# Altium PCB ctrb0505-A.PcbDoc (part 1 of 2)
Units mm, origin at the board's own origin, x right, y up, seen from the top; angles counter-clockwise.
Board outline 92.5 x 72 mm, 4 copper layers (Top Layer, Mid-Layer 1, Mid-Layer 2, Bottom Layer); 143 components, 70 nets, 526 pads, 81 vias.
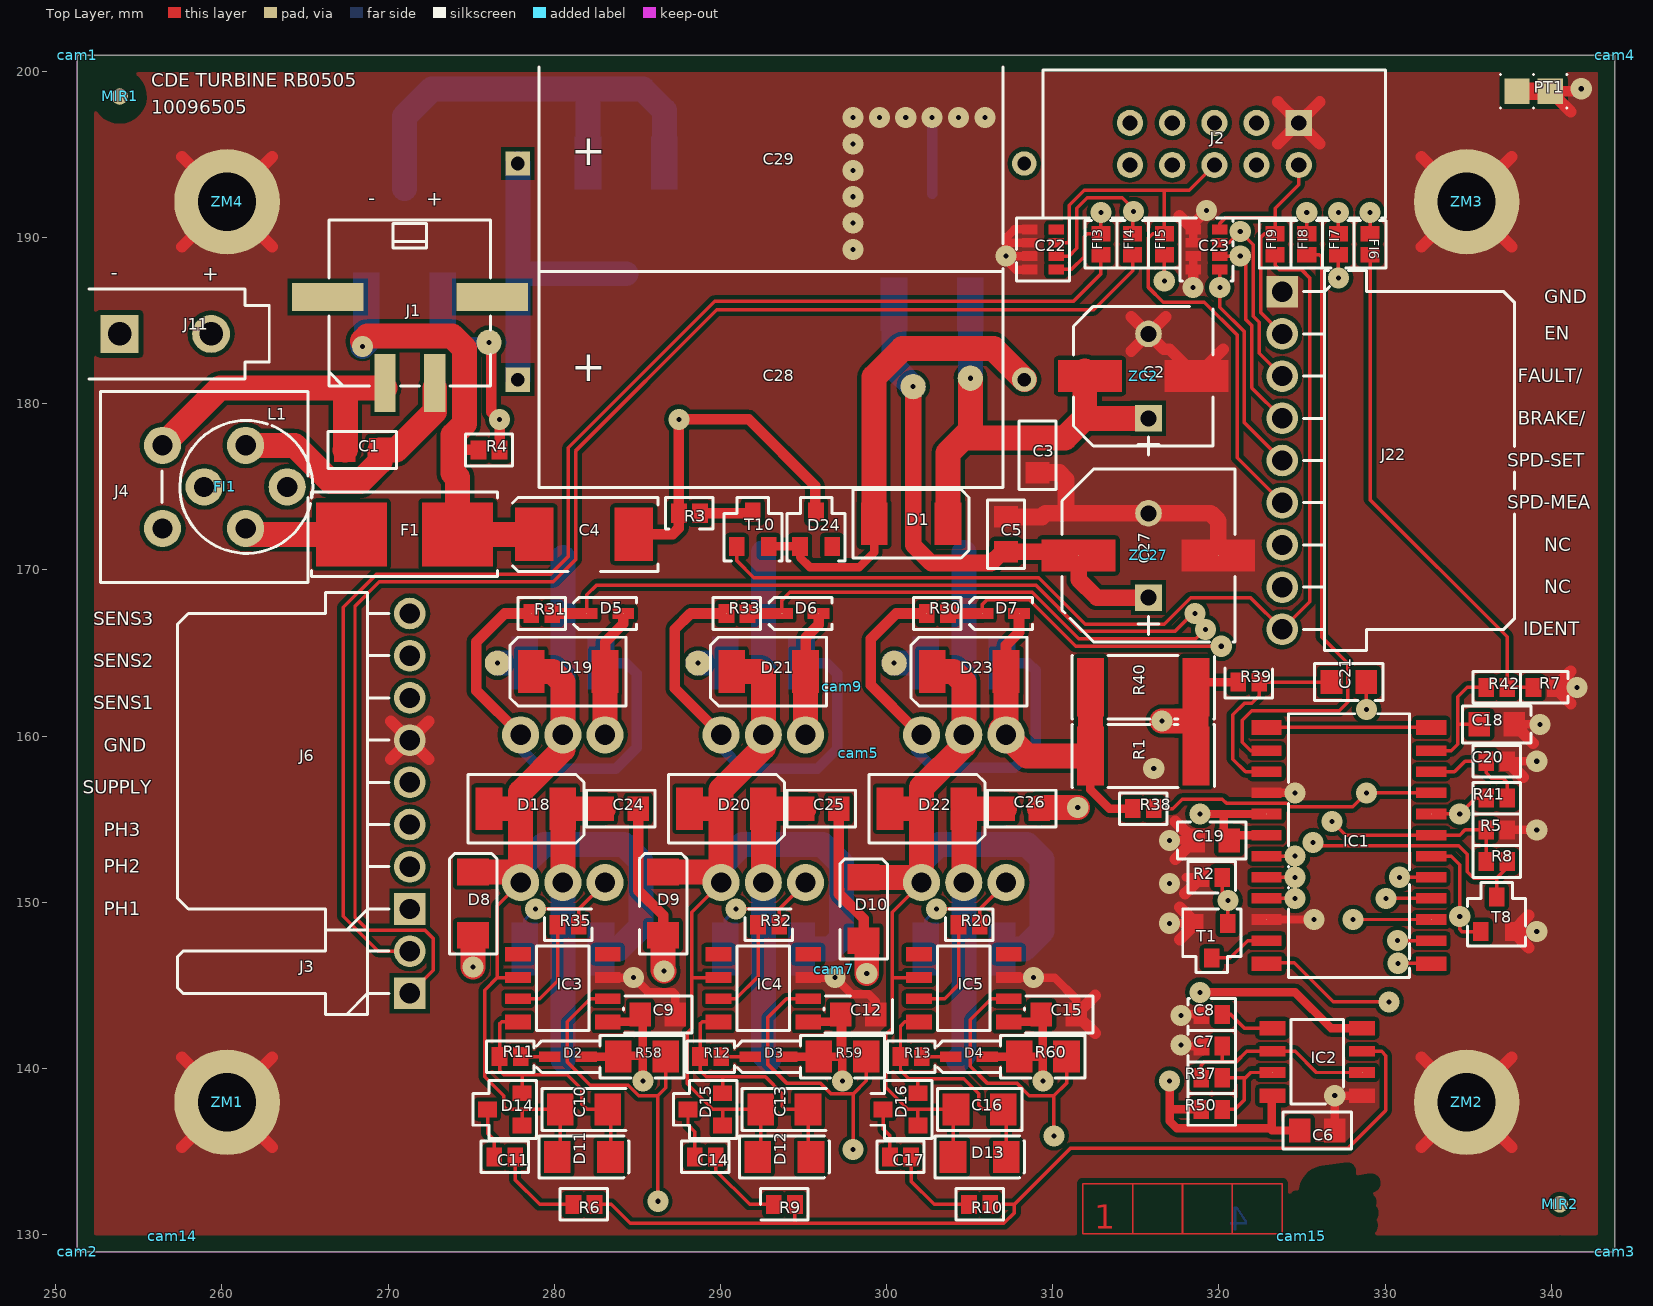
[diagram p0: Top Layer view]
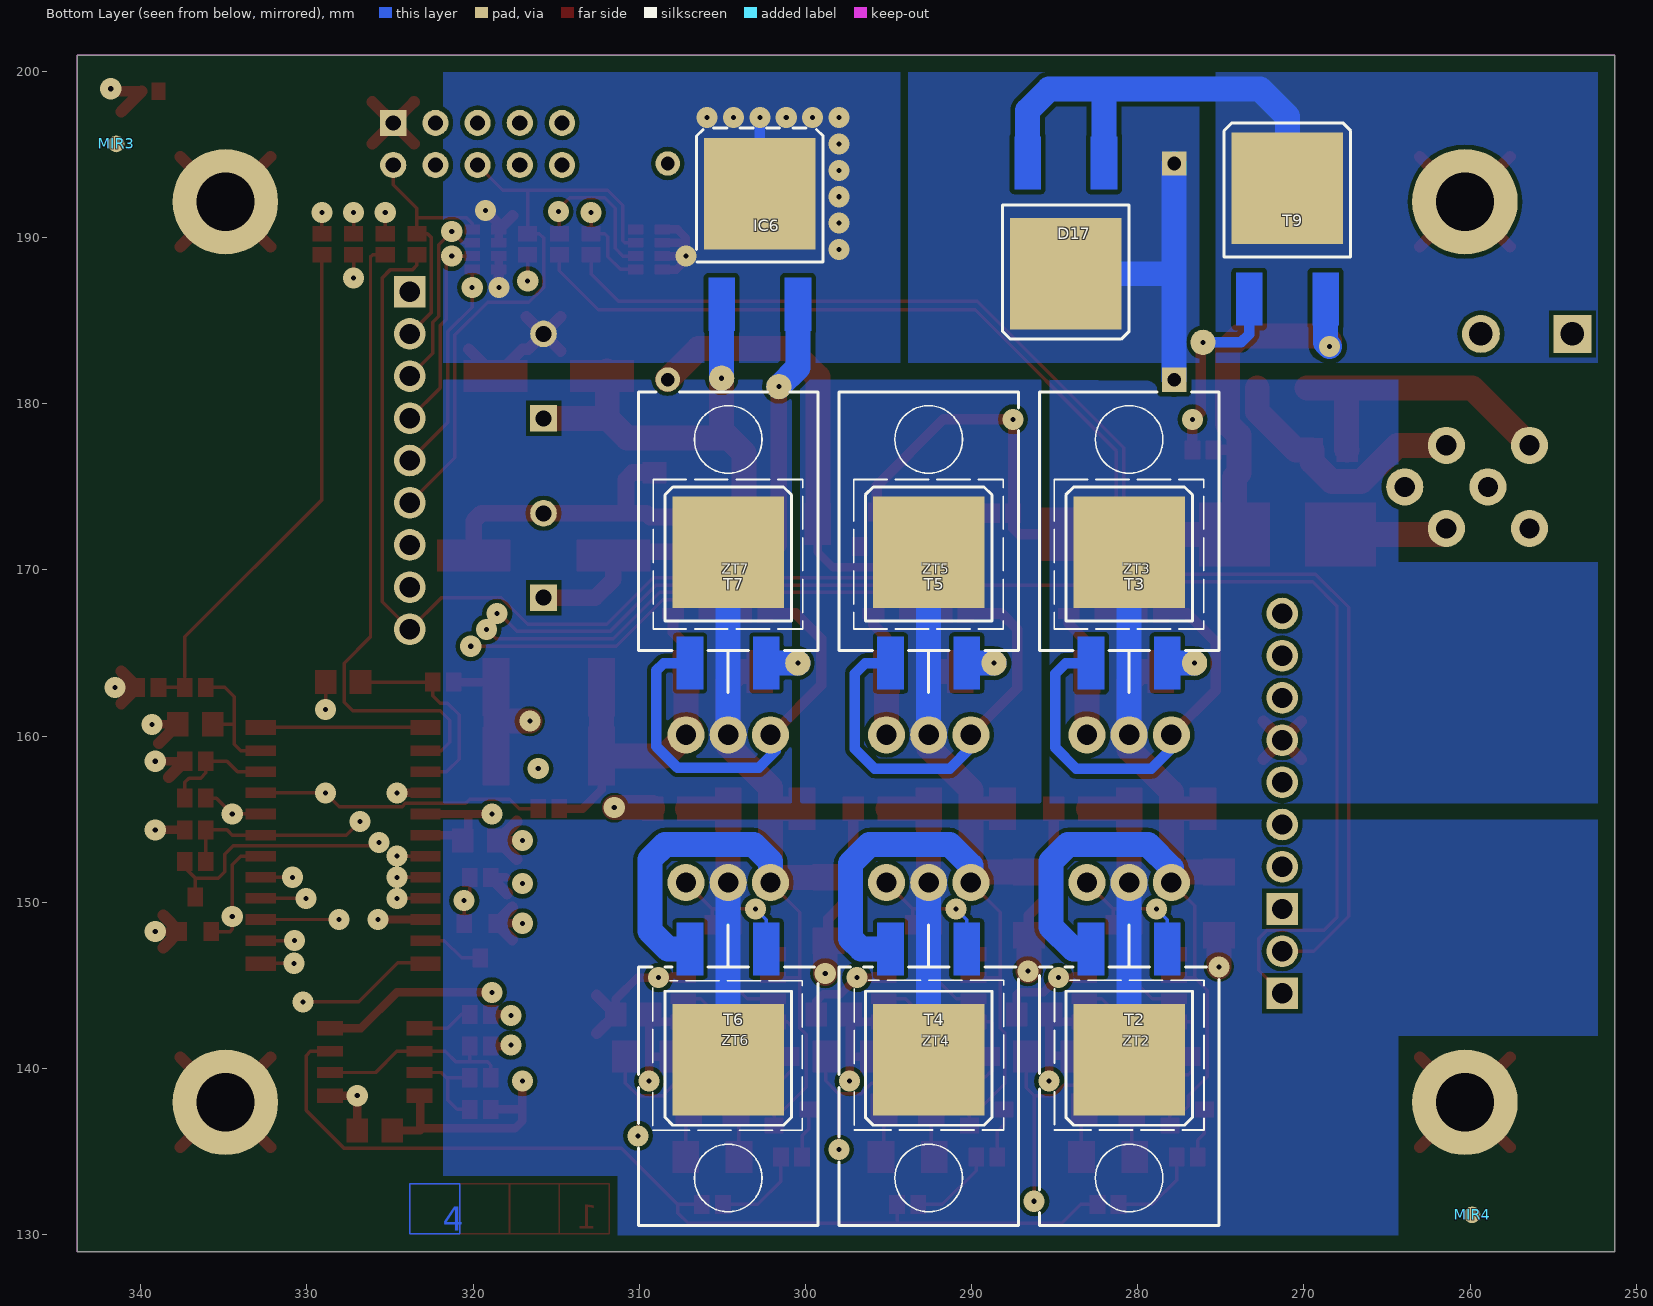
[diagram p1: Bottom Layer view, seen from below]
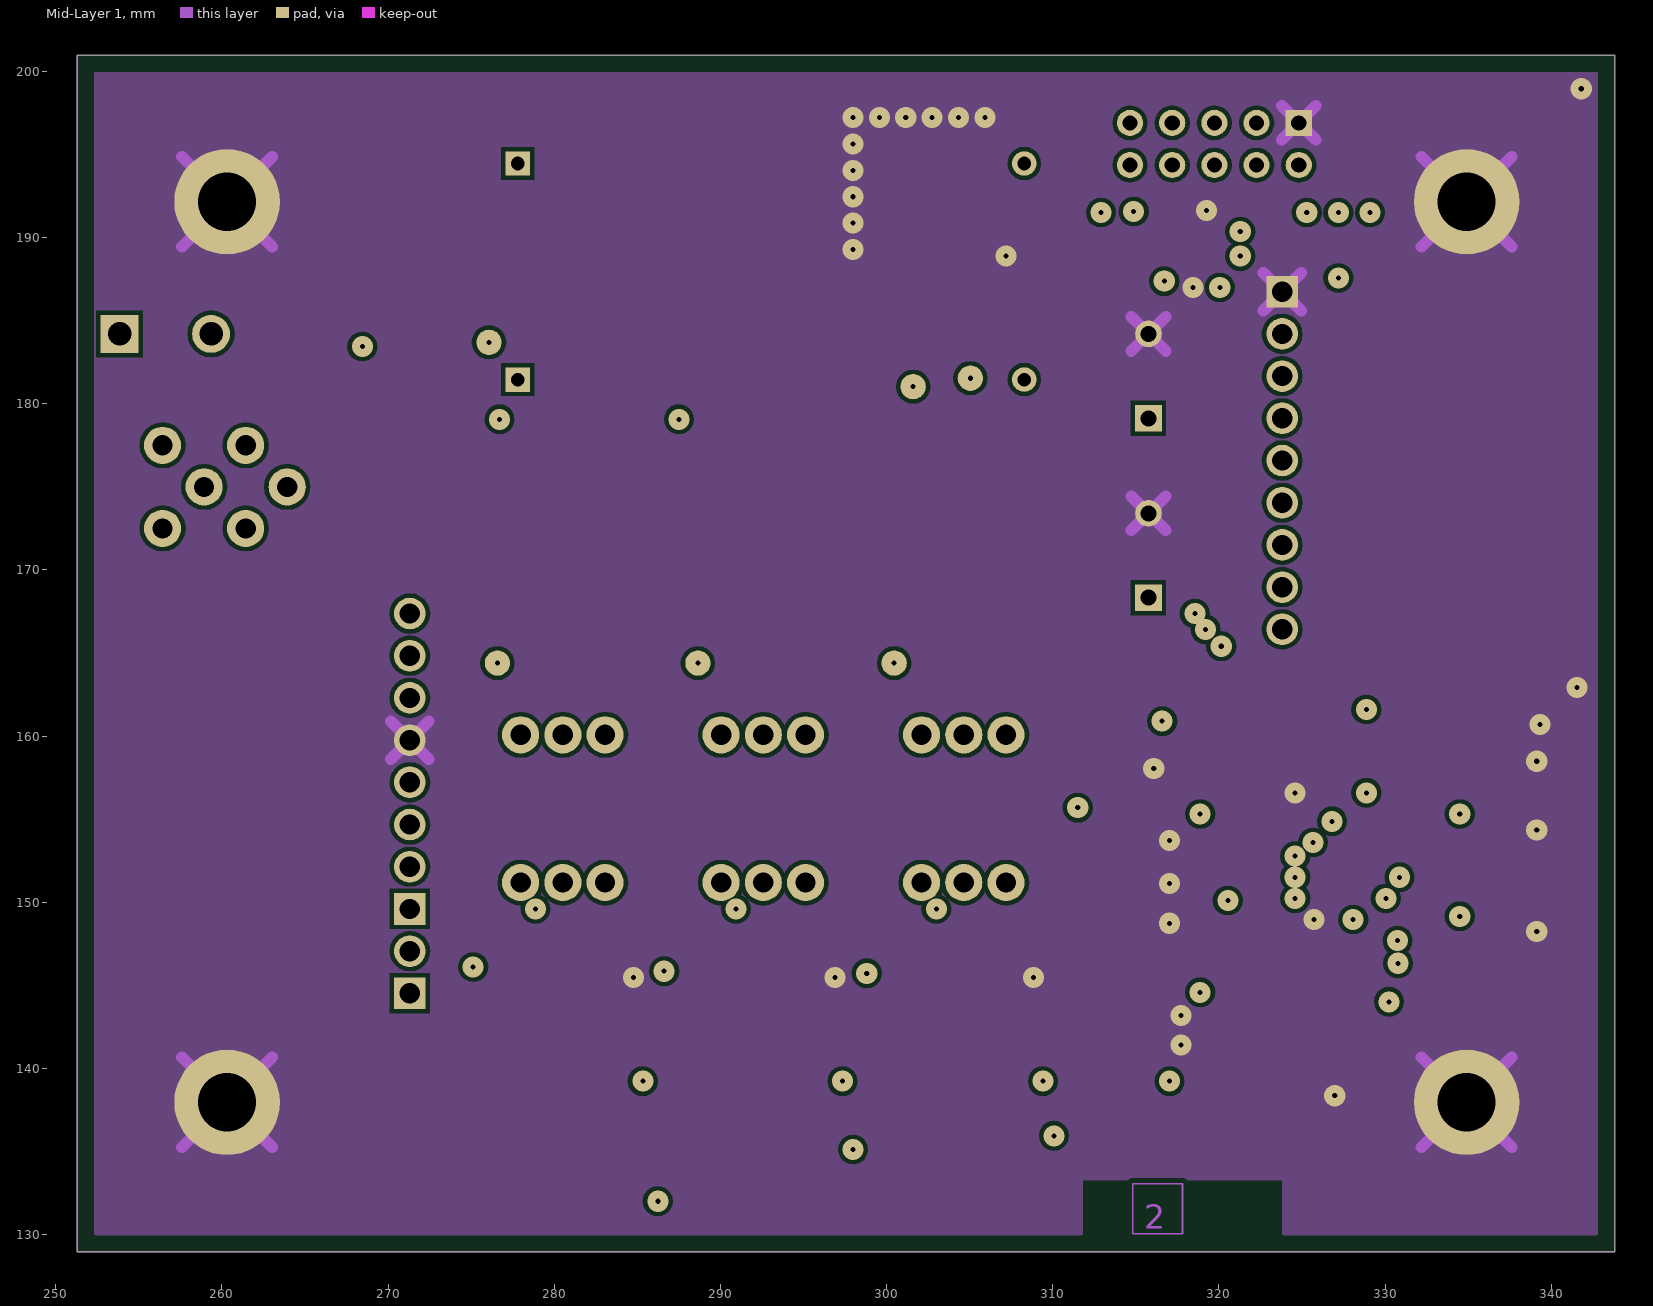
[diagram p2: Mid-Layer 1]
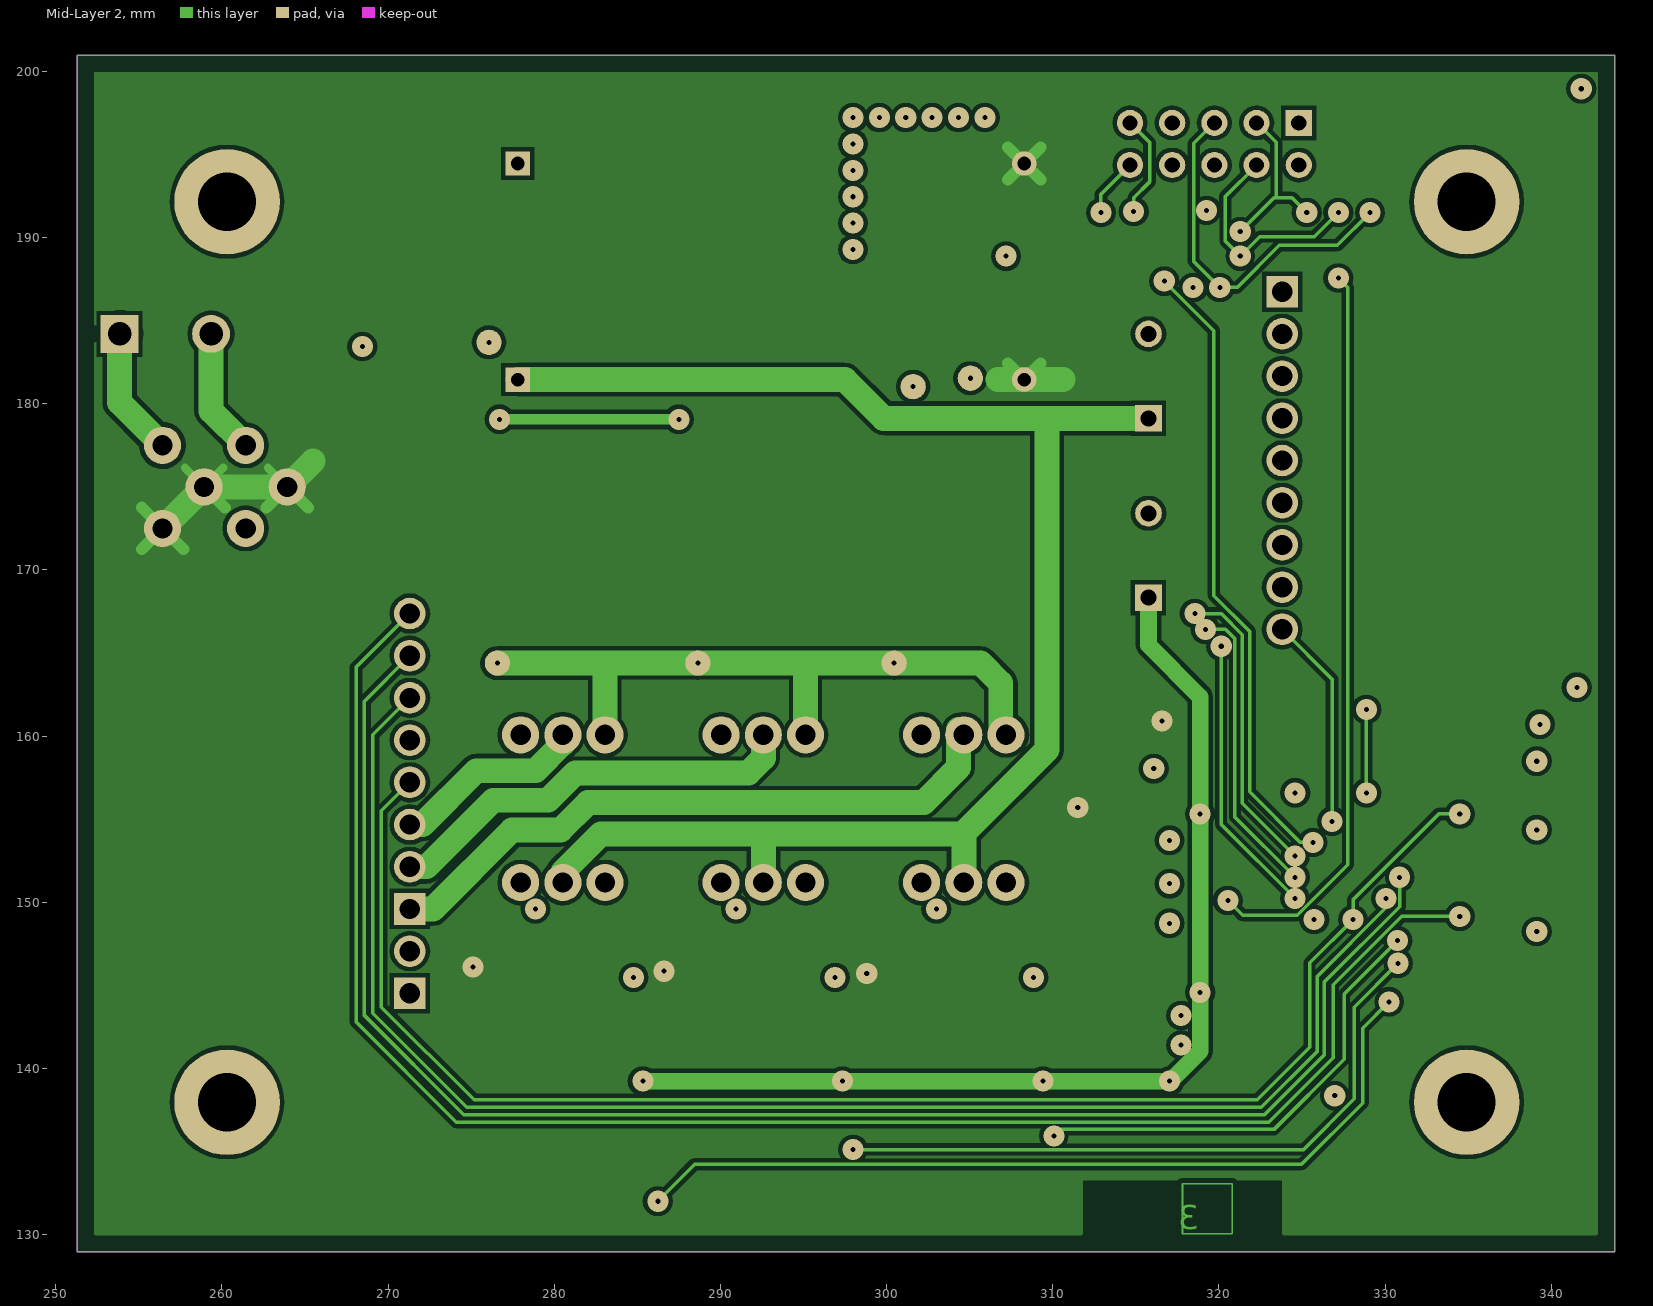
[diagram p3: Mid-Layer 2]

## Layer stack, top to bottom
Resist-A: solder mask 0.0102, Solder Resist, Dk 3.5
Top Layer: signal copper 0.0356
Dielectric 1: dielectric 0.32, FR-4, Dk 4.8
Mid-Layer 1: signal copper 0.0356
Dielectric2: dielectric 0.32, FR-4, Dk 4.8
Mid-Layer 2: signal copper 0.0356
Dielectric3: dielectric 0.32, FR-4, Dk 4.8
Bottom Layer: signal copper 0.0356
Resist-B: solder mask 0.0102, Solder Resist, Dk 3.5

## Board outline
251.306,128.959 251.306,200.959 343.806,200.959 343.806,128.959 251.306,128.959

## Design rules (kind name [scope] priority, off if disabled: settings)
Clearance [All] p1: gap=0.254 ignorepadtopadclearanceinfootprint=FALSE except(0: Arc-Hole Track-Hole SMDPad-Hole THPad-Hole Via-Hole Fill-Hole Poly-Hole Region-Hole Text-Hole)
PlaneClearance PlaneClearance_40640 [(InPadClass('VIA-091X03-VE') AND (OnLayer('Assem_(MISC)') OR OnLayer('No_PISTE+VIA_FC')))] p1: clearance=0.406
PlaneClearance PlaneClearance_55880 [(InPadClass('VIA-091X03-VE') AND (OnLayer('Symbol-B-1')))] p2: clearance=0.559
PlaneClearance PlaneClearance_30480 [(InPadClass('VIA-091X03-VE') AND (OnLayer('HeightLimit-A') OR OnLayer('Symbol-B-1') OR OnLayer('Symbol-A-1')))] p3: clearance=0.305
PlaneClearance PlaneClearance_175260 [(InPadClass('MEL35M') AND (OnLayer('Assem_(MISC)') OR OnLayer('No_PISTE+VIA_FC')))] p4: clearance=1.753
PlaneClearance PlaneClearance_172720 [(InPadClass('MEL35M') AND (OnLayer('Symbol-B-1')))] p5: clearance=1.727
PlaneClearance PlaneClearance_142240 [(InPadClass('MEL35M') AND (OnLayer('HeightLimit-A') OR OnLayer('Symbol-B-1') OR OnLayer('Symbol-A-1')))] p6: clearance=1.422
PlaneClearance PlaneClearance_58420 [(InPadClass('P.Q-1') AND (OnLayer('Symbol-B-1'))) OR (InPadClass('P.Q') AND (OnLayer('HeightLimit-A') OR OnLayer('Symbol-B-1') OR OnLayer('Symbol-A-1')))] p7: clearance=0.584
PlaneClearance PlaneClearance_45720 [(InPadClass('P.K1') AND (OnLayer('Assem_(MISC)') OR OnLayer('No_PISTE+VIA_FC')))] p8: clearance=0.457
PlaneClearance PlaneClearance_64770 [(InPadClass('P.K1-1') AND (OnLayer('Symbol-B-1'))) OR (InPadClass('P.K1') AND (OnLayer('Symbol-B-1')))] p9: clearance=0.648
PlaneClearance PlaneClearance_34290 [(InPadClass('P.K1-1') AND (OnLayer('Symbol-B-1'))) OR (InPadClass('P.K1') AND (OnLayer('HeightLimit-A') OR OnLayer('Symbol-B-1') OR OnLayer('Symbol-A-1')))] p10: clearance=0.343
PlaneClearance PlaneClearance_60960 [(InPadClass('P.K') AND (OnLayer('Assem_(MISC)') OR OnLayer('No_PISTE+VIA_FC')))] p11: clearance=0.61
PlaneClearance PlaneClearance_71120 [(InPadClass('P.K') AND (OnLayer('HeightLimit-A') OR OnLayer('Symbol-B-1') OR OnLayer('Symbol-A-1')))] p12: clearance=0.711
PlaneClearance PlaneClearance_50800 [(InPadClass('P.K') AND (OnLayer('HeightLimit-A') OR OnLayer('Symbol-B-1') OR OnLayer('Symbol-A-1')))] p13: clearance=0.508
PlaneClearance PlaneClearance_43180 [(InPadClass('DIP') AND (OnLayer('Assem_(MISC)') OR OnLayer('No_PISTE+VIA_FC'))) OR (InPadClass('P.V') AND (OnLayer('Assem_(MISC)') OR OnLayer('No_PISTE+VIA_FC'))) OR (InPadClass('P.Q-1') AND (OnLayer('Symbol-B-1'))) OR (InPadClass('P.Q') AND (OnLayer('HeightLimit-A') OR OnLayer('Symbol-B-1') OR OnLayer('Symbol-A-1')))] p14: clearance=0.432
PlaneClearance PlaneClearance_48260 [(InPadClass('DIP-1') AND (OnLayer('Symbol-B-1'))) OR (InPadClass('DIP') AND (OnLayer('HeightLimit-A') OR OnLayer('Symbol-B-1') OR OnLayer('Symbol-A-1'))) OR (InPadClass('P.V-1') AND (OnLayer('Symbol-B-1'))) OR (InPadClass('P.V') AND (OnLayer('HeightLimit-A') OR OnLayer('Symbol-B-1') OR OnLayer('Symbol-A-1')))] p15: clearance=0.483
PlaneClearance PlaneClearance_33020 [(InPadClass('DIP-1') AND (OnLayer('Symbol-B-1'))) OR (InPadClass('DIP') AND (OnLayer('HeightLimit-A') OR OnLayer('Symbol-B-1') OR OnLayer('Symbol-A-1'))) OR (InPadClass('P.V-1') AND (OnLayer('Symbol-B-1'))) OR (InPadClass('P.V') AND (OnLayer('HeightLimit-A') OR OnLayer('Symbol-B-1') OR OnLayer('Symbol-A-1')))] p16: clearance=0.33
PlaneClearance PlaneClearance_41910 [(InPadClass('P.N') AND (OnLayer('Assem_(MISC)') OR OnLayer('No_PISTE+VIA_FC')))] p17: clearance=0.419
PlaneClearance PlaneClearance_53340 [(InPadClass('P.N-1') AND (OnLayer('Symbol-B-1'))) OR (InPadClass('P.N') AND (OnLayer('Symbol-B-1'))) OR (InPadClass('P.Q') AND (OnLayer('Assem_(MISC)') OR OnLayer('No_PISTE+VIA_FC')))] p18: clearance=0.533
PlaneClearance PlaneClearance_31750 [(InPadClass('P.N-1') AND (OnLayer('Symbol-B-1'))) OR (InPadClass('P.N') AND (OnLayer('HeightLimit-A') OR OnLayer('Symbol-B-1') OR OnLayer('Symbol-A-1')))] p19: clearance=0.318
PlaneConnect [All] p1: planeconnectstyle=Direct reliefexpansion=0.508 reliefentries=4 reliefconductorwidth=0.254 reliefairgap=0.254
PolygonConnect [All] p1: connectstyle=Direct reliefconductorwidth=0.254 reliefentries=4 polygonreliefangle="90 Angle" airgapwidth=0.254
RoutingVias RoutingVias_VIA-091X03-VE_2 [OnLayer('Assem_(MISC)') OR OnLayer('No_PISTE+VIA_FC')] p1: holewidth=0.305 width=1.118 viastyle="Through Hole" minholewidth=0.305 minwidth=1.118 maxholewidth=0.305 maxwidth=1.118
RoutingVias RoutingVias_VIA-091X03-VE_1 [OnLayer('Symbol-B-1')] p2: holewidth=0.305 width=1.422 viastyle="Through Hole" minholewidth=0.305 minwidth=1.422 maxholewidth=0.305 maxwidth=1.422
RoutingVias RoutingVias_VIA-091X03-VE [OnLayer('HeightLimit-A') OR OnLayer('Symbol-B-1') OR OnLayer('Symbol-A-1')] p3: holewidth=0.305 width=0.914 viastyle="Through Hole" minholewidth=0.305 minwidth=0.914 maxholewidth=0.305 maxwidth=0.914
SilkToSilkClearance [All] p1 off: silktosilkclearance=0.254
SilkToSolderMaskClearance [IsPad] p1 off: minsilkscreentomaskgap=0.254 clearancetoexposedcopper=TRUE
SolderMaskExpansion [All] p1: expansion=0.102 istentingtop=FALSE
Width [All] p1: maxlimit=0.254 minlimit=0.254 preferedwidth=0.254
26 further rules are at their usual default settings.

## Classes and differential pairs
pad class VIA-091X03-VE: Free-VIA-091X03-VE
pad class MEL35M: ZM1-1 ZM2-1 ZM3-1 ZM4-1
pad class P.Q: J11-2
pad class P.Q-1: J11-1
pad class P.K1: J3-2 J6-2 J6-3 J6-4 J6-5 J6-6 J6-7 J6-8 J22-2 J22-3 J22-4 J22-5 J22-6 J22-7 J22-8 J22-9
pad class P.K1-1: J3-1 J6-1 J22-1
pad class P.V: J2-2 J2-3 J2-4 J2-5 J2-6 J2-7 J2-8 J2-9 J2-10
pad class P.V-1: J2-1
pad class P.K: FI1-B FI1-CB FI1-CG1 FI1-CG2 FI1-CG3 FI1-PSG ZT2-D ZT2-G ZT2-S ZT3-D ZT3-G ZT3-S ZT4-D ZT4-G ZT4-S ZT5-D ZT5-G ZT5-S ZT6-D ZT6-G ZT6-S ZT7-D ZT7-G ZT7-S
pad class DIP: C28-- C29--
pad class DIP-1: C28-+ C29-+
pad class P.N: C2-- C27--
pad class P.N-1: C2-+ C27-+

## Components (designator, comment, footprint, x,y, rotation, side; value= is the part's Value field where it differs from the comment)
C1 "C-BC-C0805" C0805 268.451,177.219 r0 top
C2 "C-BTP-803" 03515 315.758,181.664 r0 top
C3 "C-BC-C0805" C0805 309.091,176.902 r90 top
C4 "C-BCP-C7343" C7343 281.786,172.139 r0 top
C5 "C-BC-C0805" C0805 307.186,172.139 r270 top
C6 "C-BC-C0805" C0805 325.918,136.262 r180 top
C7 "C-BC-C0603" C0603 319.568,141.342 r0 top
C8 "C-BC-C0603" C0603 319.568,143.247 r0 top
C9 "C-BC-C0805" C0805 286.231,143.247 r180 top
C10 "C-BC-C1206" RC1206 281.786,137.532 r0 top
C11 "C-BC-C0603" C0603 277.023,134.674 r180 top
C12 "C-BC-C0805" C0805 298.296,143.247 r180 top
C13 "C-BC-C1206" RC1206 293.851,137.532 r0 top
C14 "C-BC-C0603" C0603 289.088,134.674 r180 top
C15 "C-BC-C0805" C0805 310.361,143.247 r180 top
C16 "C-BC-C1206" RC1206 305.598,137.532 r0 top
C17 "C-BC-C0603" C0603 300.836,134.674 r180 top
C18 "C-BC-C0805" C0805 336.713,160.709 r0 top
C19 "C-BC-C0805" C0805 319.568,153.724 r180 top
C20 "C-BC-C0603" C0603 336.713,158.487 r180 top
C21 "C-BC-C0805" C0805 327.823,163.249 r0 top
C22 "CC-BC-C0612" C0612-4 309.408,189.284 r90 top
C23 "CC-BC-C0612" C0612-4 319.251,189.284 r270 top
C24 "C-BC-C0805" C0805 284.008,155.629 r0 top
C25 "C-BC-C0805" C0805 296.073,155.629 r0 top
C26 "C-BC-C0805" C0805 308.138,155.629 r0 top
C27 "C-BTP-803" 03515 315.758,170.869 r0 top
C28 "C-BTP-HT1327" HT-13X27 277.806,181.459 r0 top
C29 "C-BTP-HT1327" HT-13X27 277.806,194.459 r0 top
cam1 "COIN_EXTERNE" COIN_EXTERNE 251.306,200.959 r0 top
cam2 "COIN_EXTERNE" COIN_EXTERNE 251.306,128.959 r90 top
cam3 "COIN_EXTERNE" COIN_EXTERNE 343.806,128.959 r180 top
cam4 "COIN_EXTERNE" COIN_EXTERNE 343.806,200.959 r270 top
cam5 "FILM18_HORIZONTAL" FILM18_HORIZONTAL 298.306,158.959 r0 top
cam6 "A3_PER_COVIDIEN" A3_PER_COVIDIEN 216,139.5 r0 top
cam7 "A3_EQFC_COVIDIEN" A3_EQFC_COVIDIEN 296.806,145.959 r0 top
cam8 "PER-COVIDIEN_TEXTE" PER-COVIDIEN_TEXTE 260.806,97.959 r0 top
cam9 "A3_EQFS_COVIDIEN" A3_EQFS_COVIDIEN 297.306,162.959 r180 top
cam12 "FABRICATION-FEE" FABRICATION-FEE 148.906,235.559 r0 top
cam13 "PERCAGE_TABLEAU" PERCAGE_TABLEAU 140.106,152.859 r0 top
cam14 "FEE_COMP" FEE_COMP 257.021,129.912 r180 top
cam15 "FEE_COMP" FEE_COMP 324.966,129.912 r0 top
D1 "D-BC-SMB" SMB 301.471,172.774 r180 top
D2 "D-BC-SOD323" SOD323 280.833,140.707 r0 top
D3 "D-BC-SOD323" SOD323 292.898,140.707 r0 top
D4 "D-BC-SOD323" SOD323 304.963,140.707 r0 top
D5 "D-BC-SOD323" SOD323 283.056,167.377 r0 top
D6 "D-BC-SOD323" SOD323 294.803,167.377 r0 top
D7 "D-BC-SOD323" SOD323 306.868,167.377 r0 top
D8 "D-BC-SMA" SMA 275.118,149.914 r270 top
D9 "D-BC-SMA" SMA 286.548,149.914 r270 top
D10 "D-BC-SMA" SMA 298.613,149.597 r270 top
D11 "D-BC-SOD80" SOD80 281.786,134.674 r0 top
D12 "D-BC-SOD80" SOD80 293.851,134.674 r0 top
D13 "D-BC-SOD80" SOD80 305.598,134.674 r0 top
D14 "D-BC-SOT23" SOT23-1G 277.023,137.532 r90 top
D15 "D-BC-SOT23" SOT23-1G 289.088,137.532 r90 top
D16 "D-BC-SOT23" SOT23-1G 300.836,137.532 r90 top
D17 "D-BC-DPAK-2ANODES" DPAK-2ANODES 284.326,189.602 r0 bottom
D18 "D-BC-SMB" SMB 278.293,155.629 r180 top
D19 "D-BC-SMB" SMB 280.833,163.884 r0 top
D20 "D-BC-SMB" SMB 290.358,155.629 r180 top
D21 "D-BC-SMB" SMB 292.898,163.884 r0 top
D22 "D-BC-SMB" SMB 302.423,155.629 r180 top
D23 "D-BC-SMB" SMB 304.963,163.884 r0 top
D24 "D-BC-SOT23" SOT23-1G 295.756,172.457 r0 top
F1 "FU-BC-154000" FU154000 270.991,172.139 r0 top
FI1 "FL-10-BNX002-01" BNX002 258.926,174.997 r0 top
FI3 "SF-BC-S0603" C0603 312.901,189.602 r270 top
FI4 "SF-BC-S0603" C0603 314.806,189.602 r270 top
FI5 "SF-BC-S0603" C0603 316.711,189.602 r270 top
FI6 "SF-BC-S0603" C0603 329.093,189.602 r270 top
FI7 "SF-BC-S0603" C0603 327.188,189.602 r270 top
FI8 "SF-BC-S0603" C0603 325.283,189.602 r270 top
FI9 "SF-BC-S0603" C0603 323.378,189.602 r270 top
IC1 "L-BC-SO24" MX.A24_COMPOSANT 327.823,153.407 r90 top
IC2 "L-BC-SO08" MX.A8_COMPOSANT 325.918,140.389 r90 top
IC3 "L-BC-SO08" MX.A8_COMPOSANT 280.516,144.834 r90 top
IC4 "L-BC-SO08" MX.A8_COMPOSANT 292.581,144.834 r90 top
IC5 "L-BC-SO08" MX.A8_COMPOSANT 304.646,144.834 r90 top
IC6 "REG-BC-DPAK" DPAK 302.741,190.872 r180 bottom
J1 "F-COCMS-MOL43650-0212" MOL43650-02C 271.306,181.249 r180 top
J2 "F-CO-HE10-2010D" BP2X5D 324.806,196.904 r180 top
J3 "F-CO-MOL7395M02" MOL7395-2 271.308,144.517 r90 top
J6 "F-CO-MOL7395M08" MOL7395-8 271.308,149.597 r90 top
J11 "F-CO-MOL5566-02" MOL5566-2 253.846,184.204 r270 top
J22 "F-CO-MOL7395M09" MOL7395-9 323.806,186.744 r270 top
MIR1 "MIRECMS" MIRECMS-SAFT#1 253.846,198.492 r0 top
MIR2 "MIRECMS" MIRECMS-SAFT#1 340.523,131.817 r0 top
MIR3 "MIRECMS" MIRECMS-SAFT#2 341.476,195.634 r180 bottom
MIR4 "MIRECMS" MIRECMS-SAFT#2 259.878,131.182 r180 bottom
PT1 "PT-CMS-C12000" C12000 338.936,198.809 r180 top
R1 "R-BC-R2512" R2512 315.441,158.804 r0 top
R2 "R-BC-R0603" R0603 319.568,151.502 r0 top
R3 "R-BC-R0603" R0603 288.136,173.409 r180 top
R4 "R-BC-R0603" R0603 276.071,177.219 r180 top
R5 "R-BC-R0603" R0603 336.713,154.359 r180 top
R6 "R-BC-R0603" R0603 281.786,131.817 r0 top
R7 "R-BC-R0603" R0603 339.571,162.932 r180 top
R8 "R-BC-R0603" R0603 336.713,152.454 r0 top
R9 "R-BC-R0603" R0603 293.851,131.817 r0 top
R10 "R-BC-R0603" R0603 305.598,131.817 r0 top
R11 "R-BC-R0603" R0603 277.341,140.707 r180 top
R12 "R-BC-R0603" R0603 289.406,140.707 r180 top
R13 "R-BC-R0603" R0603 301.471,140.707 r180 top
R20 "R-BC-R0603" R0603 304.963,148.644 r0 top
R30 "R-BC-R0603" R0603 303.058,167.377 r180 top
R31 "R-BC-R0603" R0603 279.246,167.377 r180 top
R32 "R-BC-R0603" R0603 292.898,148.644 r0 top
R33 "R-BC-R0603" R0603 290.993,167.377 r180 top
R35 "R-BC-R0603" R0603 280.833,148.644 r0 top
R37 "R-BC-R0603" R0603 319.568,139.437 r0 top
R38 "R-BC-R0603" R0603 315.441,155.629 r180 top
R39 "R-BC-R0603" R0603 321.791,163.249 r180 top
R40 "R-BC-R2512" R2512 315.441,162.932 r180 top
R41 "R-BC-R0603" R0603 336.713,156.264 r0 top
R42 "R-BC-R0603" R0603 336.713,162.932 r180 top
R50 "R-BC-R0603" R0603 319.568,137.532 r180 top
R58 "R-BC-R1206" RC1206 285.278,140.707 r180 top
R59 "R-BC-R1206" RC1206 297.343,140.707 r180 top
R60 "R-BC-R1206" RC1206 309.408,140.707 r180 top
T1 "Q-SOT23-IRLML2803" SOT23-GSD 319.568,147.692 r180 top
T2 "Q-BC-DPAK-GDS" DPAK-GDS 280.516,142.294 r0 bottom
T3 "Q-BC-DPAK-GDS" DPAK-GDS 280.516,169.282 r180 bottom
T4 "Q-BC-DPAK-GDS" DPAK-GDS 292.581,142.294 r0 bottom
T5 "Q-BC-DPAK-GDS" DPAK-GDS 292.581,169.282 r180 bottom
T6 "Q-BC-DPAK-GDS" DPAK-GDS 304.646,142.294 r0 bottom
T7 "Q-BC-DPAK-GDS" DPAK-GDS 304.646,169.282 r180 bottom
T8 "Q-SOT23-IRLML2803" SOT23-GSD 336.713,149.279 r0 top
T9 "Q-BC-DPAK-GDS" DPAK-GDS 270.991,191.189 r180 bottom
T10 "Q-SOT23-IRLML2803" SOT23-GSD 291.946,172.457 r0 top
ZC2 "C-BCP-WX8" C-SC8 315.441,181.664 r90 top
ZC27 "C-BCP-WX10" C-SC10 315.758,170.869 r90 top
ZM1 "FIX-0035M" FIX35M 260.306,137.959 r0 top
ZM2 "FIX-0035M" FIX35M 334.906,137.959 r0 top
ZM3 "FIX-0035M" FIX35M 334.906,192.159 r0 top
ZM4 "FIX-0035M" FIX35M 260.306,192.159 r0 top
ZT2 "Q-BT-TO220AB-GDS-INV" TO220ABGDS-INV_COUCHE 280.516,133.404 r0 bottom
ZT3 "Q-BT-TO220AB-GDS-INV" TO220ABGDS-INV_COUCHE 280.516,177.854 r180 bottom
ZT4 "Q-BT-TO220AB-GDS-INV" TO220ABGDS-INV_COUCHE 292.581,133.404 r0 bottom
ZT5 "Q-BT-TO220AB-GDS-INV" TO220ABGDS-INV_COUCHE 292.581,177.854 r180 bottom
ZT6 "Q-BT-TO220AB-GDS-INV" TO220ABGDS-INV_COUCHE 304.646,133.404 r0 bottom
ZT7 "Q-BT-TO220AB-GDS-INV" TO220ABGDS-INV_COUCHE 304.646,177.854 r180 bottom

## Footprints (in the part's own frame and the unit in brackets; to place one, negate y for a bottom-side part, rotate by r counter-clockwise, add the part's x,y. Pads: shape width x height; smd on the part's side, far side on the other; paste and mask are expansions set on the pad)
03515 [mil]
  rect 63x63 hole 38 mask+2.03: +(0,-100)
  round 63 hole 38 mask+2.03: -(0,100)
  silkscreen extent -25,-188 25,-144
A3_EQFC_COVIDIEN [mm]
A3_EQFS_COVIDIEN [mm]
A3_PER_COVIDIEN [mm]
BNX002 [mil]
  round 88 hole 48 mask+2.03: B(98.43,98.43) CB(98.43,-98.43) CG1(-98.43,-98.43) CG2(0,0) CG3(196.85,0) PSG(-98.43,98.43)
  silkscreen extent -246,-226 246,226, body extent -246,-226 246,226, height 512
BP2X5D [mil]
  rect 62x62 hole 36 mask+2.03: 1(0,0)
  round 62 hole 36 mask+2.03: 2(0,100) 3(100,0) 4(100,100) 5(200,0) 6(200,100) 7(300,0) 8(300,100) 9(400,0) 10(400,100)
  silkscreen extent -206,-125 606,225
C0603 [mm]
  round 0.005 smd: 1(-0.635,0) 2(0.635,0)
  Top Layer region: 1.092,-0.559 0.178,-0.559 0.178,0.559 1.092,0.559
  Top Layer region: -0.178,-0.559 -1.092,-0.559 -1.092,0.559 -0.178,0.559
  silkscreen extent -1.43,-0.95 1.43,0.95, body extent -1.43,-0.95 1.43,0.95, height 1.02
C0612-4 [mm]
  round 0.005 smd: 1(-1.2,-0.8) 2(-0.4,-0.8) 3(0.4,-0.8) 4(1.2,-0.8) 5(1.2,0.8) 6(0.4,0.8) 7(-0.4,0.8) 8(-1.2,0.8)
  Top Layer region: -1.479,0.343 -1.479,1.257 -0.921,1.257 -0.921,0.343
  Top Layer region: -0.679,0.343 -0.679,1.257 -0.121,1.257 -0.121,0.343
  Top Layer region: 0.121,0.343 0.121,1.257 0.679,1.257 0.679,0.343
  Top Layer region: 0.921,0.343 0.921,1.257 1.479,1.257 1.479,0.343
  Top Layer region: 0.921,-1.257 0.921,-0.343 1.479,-0.343 1.479,-1.257
  Top Layer region: 0.121,-1.257 0.121,-0.343 0.679,-0.343 0.679,-1.257
  Top Layer region: -0.679,-1.257 -0.679,-0.343 -0.121,-0.343 -0.121,-1.257
  Top Layer region: -1.479,-1.257 -1.479,-0.343 -0.921,-0.343 -0.921,-1.257
  silkscreen extent -1.91,-1.59 1.91,1.59, body extent -1.91,-1.59 1.91,1.59, height 1.27
C0805 [mm]
  round 0.005 smd: 1(-1.05,0) 2(1.05,0)
  Top Layer region: 1.685,-0.711 0.415,-0.711 0.415,0.711 1.685,0.711
  Top Layer region: -0.415,-0.711 -1.685,-0.711 -1.685,0.711 -0.415,0.711
  silkscreen extent -2.06,-1.11 2.06,1.11, body extent -2.06,-1.11 2.06,1.11, height 1.32
C7343 [mil]
  round 0.2 smd: +(-118,0) -(118,0)
  Top Layer region: 163,-63 73,-63 73,63 163,63
  Top Layer region: -73,-63 -163,-63 -163,63 -73,63
  silkscreen extent -169,-88 175,88, body extent -175,-88 175,88, height 122
C12000 [mil]
  rect 60x60 smd paste+2.03 mask+2.03: 1(-39.37,0) 2(39.37,0)
  Top Layer region: 15.75,-19.68 -15.75,-19.68 -15.75,19.69 15.75,19.69
  silkscreen extent -79,-39 79,39, body extent -79,-39 79,39, height 52
C-SC8 [mm]
  round 0.005 smd: +(0,3.2) -(0,-3.2)
  Top Layer region: -0.952,-5.105 -0.953,-1.295 0.953,-1.295 0.953,-5.105
  Top Layer region: -0.953,1.295 -0.953,5.105 0.952,5.105 0.953,1.295
  silkscreen extent -4.2,-4.2 4.2,4.2
C-SC10 [mm]
  round 0.005 smd: +(0,4.2) -(0,-4.2)
  Top Layer region: -0.952,-6.41 -0.952,-1.99 0.953,-1.99 0.953,-6.41
  Top Layer region: -0.953,1.99 -0.953,6.41 0.952,6.41 0.952,1.99
  silkscreen extent -5.2,-5.2 5.2,5.2
COIN_EXTERNE [mm]
DPAK [mil]
  round 0.2 smd: 1(-90.55,-192.5) 3(90.55,-192.5)
  rect 264x264 smd: 2(0,70)
  Top Layer region: 59.55,-255 121.55,-255 121.55,-130 59.55,-130
  Top Layer region: -121.55,-255 -59.55,-255 -59.55,-130 -121.55,-130
  silkscreen extent -150,-93 150,225
DPAK-2ANODES [mil]
  round 0.2 smd: A1(-90.55,-192.5) A2(90.55,-192.5)
  rect 264x264 smd: K(0,70)
  Top Layer region: 121.55,-130 59.55,-130 59.55,-255 121.55,-255
  Top Layer region: -59.55,-130 -121.55,-130 -121.55,-255 -59.55,-255
  silkscreen extent -150,-92 150,225
DPAK-GDS [mil]
  rect 264x264 smd: D(0,70)
  round 0.2 smd: G(-90.55,-192.5) S(90.55,-192.5)
  Top Layer region: 121.55,-130 59.55,-130 59.55,-255 121.55,-255
  Top Layer region: -59.55,-130 -121.55,-130 -121.55,-255 -59.55,-255
  silkscreen extent -150,-92 150,225
FABRICATION-FEE [mm]
FEE_COMP [mm]
FILM18_HORIZONTAL [mm]
FIX35M [mil]
  round 250 hole 138 mask+6.6: 1(0,0)
FU154000 [mil]
  round 0.2 smd: 1(-125.5,0) 2(125.5,0)
  Top Layer region: 209,-75 42,-75 42,75 209,75
  Top Layer region: -42,-75 -209,-75 -209,75 -42,75
  silkscreen extent -220,-100 220,100
HT-13X27 [mil]
  rect 58x58 hole 32 mask+2.03: +(0,0)
  round 58 hole 32 mask+2.03: -(1200,0)
  silkscreen extent 50,-256 1150,256
MIRECMS-SAFT#1 [mm] "DF3"
  round 1 smd paste+0.508 mask+0.508: 1(0,0)
MIRECMS-SAFT#2 [mm] "DF3"
  round 1 smd: 1(0,0)
MOL5566-2 [mil]
  rect 90x90 hole 56 mask+2.03: 1(0,0)
  round 90 hole 56 mask+2.03: 2(0,216.54)
  silkscreen extent -106,-73 106,354
MOL7395-2 [mil]
  rect 75x75 hole 48 mask+2.29: 1(0,0)
  round 75 hole 48 mask+2.29: 2(100,0)
  silkscreen extent -50,50 150,550
MOL7395-8 [mil]
  rect 75x75 hole 48 mask+2.29: 1(0,0)
  round 75 hole 48 mask+2.29: 2(100,0) 3(200,0) 4(300,0) 5(400,0) 6(500,0) 7(600,0) 8(700,0)
  silkscreen extent -50,50 750,550
MOL7395-9 [mil]
  rect 75x75 hole 48 mask+2.29: 1(0,0)
  round 75 hole 48 mask+2.29: 2(100,0) 3(200,0) 4(300,0) 5(400,0) 6(500,0) 7(600,0) 8(700,0) 9(800,0)
  silkscreen extent -50,50 850,550
MOL43650-02C [mm]
  rect 1.27x3.5 smd paste+0.051 mask+0.051: 1(1.5,0) 2(-1.5,0)
  rect 4.3x1.7 smd paste+0.051 mask+0.051: 3(-4.95,-5.18) 4(4.95,-5.18)
  silkscreen extent -4.85,-9.81 4.85,0.19, body extent -7.24,-9.81 7.24,1.89, height 5.6
MX.A8_COMPOSANT [mm]
  round 0.005 smd: 1(-2.032,-2.7) 2(-0.635,-2.7) 3(0.635,-2.7) 4(2.032,-2.7) 5(2.032,2.7) 6(0.635,2.7) 7(-0.635,2.7) 8(-2.032,2.7)
  Top Layer region: -2.464,1.938 -2.464,3.462 -1.6,3.462 -1.6,1.938
  Top Layer region: -0.94,1.938 -0.94,3.462 -0.33,3.462 -0.33,1.938
  Top Layer region: 0.33,1.938 0.33,3.462 0.94,3.462 0.94,1.938
  Top Layer region: 1.6,1.938 1.6,3.462 2.464,3.462 2.464,1.938
  Top Layer region: 1.6,-3.462 1.6,-1.938 2.464,-1.938 2.464,-3.462
  Top Layer region: 0.33,-3.462 0.33,-1.938 0.94,-1.938 0.94,-3.462
  Top Layer region: -0.94,-3.462 -0.94,-1.938 -0.33,-1.938 -0.33,-3.462
  Top Layer region: -2.464,-3.462 -2.464,-1.938 -1.6,-1.938 -1.6,-3.462
  silkscreen extent -2.54,-1.59 2.54,1.59, body extent -2.67,-3.46 2.67,3.46, height 1.8
MX.A24_COMPOSANT [mil]
  round 0.2 smd: 1(-280,-195) 2(-225,-195) 3(-175,-195) 4(-125,-195) 5(-75,-195) 6(-25,-195) 7(25,-195) 8(75,-195) 9(125,-195) 10(175,-195) 11(225,-195) 12(280,-195) 13(280,195) 14(225,195) 15(175,195) 16(125,195) 17(75,195) 18(25,195) 19(-25,195) 20(-75,195) 21(-125,195) 22(-175,195) 23(-225,195) 24(-280,195)
  Top Layer region: -297,160 -297,230 -263,230 -263,160
  Top Layer region: -237,160 -237,230 -213,230 -213,160
  Top Layer region: -187,160 -187,230 -163,230 -163,160
  Top Layer region: -137,160 -137,230 -113,230 -113,160
  Top Layer region: -87,160 -87,230 -63,230 -63,160
  Top Layer region: -37,160 -37,230 -13,230 -13,160
  Top Layer region: 13,160 13,230 37,230 37,160
  Top Layer region: 63,160 63,230 87,230 87,160
  Top Layer region: 113,160 113,230 137,230 137,160
  Top Layer region: 163,160 163,230 187,230 187,160
  Top Layer region: 213,160 213,230 237,230 237,160
  Top Layer region: 263,160 263,230 297,230 297,160
  Top Layer region: 263,-230 263,-160 297,-160 297,-230
  Top Layer region: 213,-230 213,-160 237,-160 237,-230
  Top Layer region: 163,-230 163,-160 187,-160 187,-230
  Top Layer region: 113,-230 113,-160 137,-160 137,-230
  Top Layer region: 63,-230 63,-160 87,-160 87,-230
  Top Layer region: 13,-230 13,-160 37,-160 37,-230
  Top Layer region: -37,-230 -37,-160 -13,-160 -13,-230
  Top Layer region: -87,-230 -87,-160 -63,-160 -63,-230
  Top Layer region: -137,-230 -137,-160 -113,-160 -113,-230
  Top Layer region: -187,-230 -187,-160 -163,-160 -163,-230
  Top Layer region: -237,-230 -237,-160 -213,-160 -213,-230
  Top Layer region: -297,-230 -297,-160 -263,-160 -263,-230
  silkscreen extent -312,-144 312,144, body extent -312,-230 312,230, height 100
PER-COVIDIEN_TEXTE [mm]
PERCAGE_TABLEAU [mm]
R0603 [mm]
  round 0.005 smd: 1(-0.635,0) 2(0.635,0)
  Top Layer region: 1.092,-0.559 0.178,-0.559 0.178,0.559 1.092,0.559
  Top Layer region: -0.178,-0.559 -1.092,-0.559 -1.092,0.559 -0.178,0.559
  silkscreen extent -1.43,-0.95 1.43,0.95, body extent -1.43,-0.95 1.43,0.95, height 1.02
R2512 [mm]
  round 0.005 smd: 1(-3.175,0) 2(3.175,0)
  Top Layer region: 3.962,-1.753 2.388,-1.753 2.388,1.753 3.962,1.753
  Top Layer region: -2.388,-1.753 -3.962,-1.753 -3.962,1.753 -2.388,1.753
  silkscreen extent -4.29,-1.91 4.29,1.91, body extent -4.29,-1.91 4.29,1.91, height 1.02
RC1206 [mil]
  round 0.2 smd: 1(-56,0) 2(56,0)
  Top Layer region: 87,-37.5 25,-37.5 25,37.5 87,37.5
  Top Layer region: -25,-37.5 -87,-37.5 -87,37.5 -25,37.5
  silkscreen extent -100,-50 100,50, body extent -100,-50 100,50, height 60
SMA [mm]
  round 0.005 smd: A(1.905,0) K(-1.905,0)
  Top Layer region: -1.118,0.952 -1.118,-0.953 -2.692,-0.953 -2.692,0.952
  Top Layer region: 2.692,0.953 2.692,-0.952 1.118,-0.952 1.118,0.953
  silkscreen extent -3.02,-1.43 3.02,1.43
SMB [mil]
  round 0.2 smd: A(87.5,0) K(-87.5,0)
  Top Layer region: -118.5,50 -56.5,50 -56.5,-50 -118.5,-50
  Top Layer region: 56.5,50 118.5,50 118.5,-50 56.5,-50
  silkscreen extent -138,-81 137,81
SOD80 [mm]
  round 0.005 smd: A(-1.6,0) K(1.6,0)
  Top Layer region: 2.387,-0.953 0.813,-0.953 0.813,0.953 2.387,0.953
  Top Layer region: -0.813,-0.953 -2.387,-0.953 -2.387,0.953 -0.813,0.953
  silkscreen extent -2.7,-1.27 2.7,1.27, body extent -2.7,-1.27 2.7,1.27, height 1.63
SOD323 [mm]
  round 0.005 smd: A(1.1,0) K(-1.1,0)
  Top Layer region: -0.465,-0.305 -1.735,-0.305 -1.735,0.305 -0.465,0.305
  Top Layer region: 1.735,-0.305 0.465,-0.305 0.465,0.305 1.735,0.305
  silkscreen extent -1.89,-0.95 1.91,0.95
SOT23-1G [mil]
  round 0.2 smd: 1(-38,-41) 2(38,-41) 3(0,41)
  Top Layer region: -18,19 -18,63 18,63 18,19
  Top Layer region: 20,-63 20,-19 56,-19 56,-63
  Top Layer region: -56,-63 -56,-19 -20,-19 -20,-63
  silkscreen extent -69,-75 69,75, body extent -69,-75 69,75, height 48
SOT23-GSD [mil]
  round 0.2 smd: D(0,41) G(-38,-41) S(38,-41)
  Top Layer region: 20,-19 56,-19 56,-63 20,-63
  Top Layer region: -56,-19 -20,-19 -20,-63 -56,-63
  Top Layer region: -18,63 18,63 18,19 -18,19
  silkscreen extent -69,-75 69,75, body extent -69,-75 69,75, height 48
TO220ABGDS-INV_COUCHE [mil]
  round 88 hole 48 mask+2.03: D(0,-700) G(100,-700) S(-100,-700)
  silkscreen extent -212,-600 212,112

## Part data
C1: library part C1
C2: library part C2
C3: library part C3
C4: library part C4
C5: library part C5
C6: library part C6
C7: library part C7
C8: library part C8
C9: library part C9
C10: library part C10
C11: library part C11
C12: library part C12
C13: library part C13
C14: library part C14
C15: library part C15
C16: library part C16
C17: library part C17
C18: library part C18
C19: library part C19
C20: library part C20
C21: library part C21
C22: library part C22
C23: library part C23
C24: library part C24
C25: library part C25
C26: library part C26
C27: library part C27
C28: library part C28
C29: library part C29
cam1: library part cam1
cam2: library part cam2
cam3: library part cam3
cam4: library part cam4
cam5: library part cam5
cam6: library part cam6
cam7: library part cam7
cam8: library part cam8
cam9: library part cam9
cam12: library part cam12
cam13: library part cam13
cam14: library part cam14
cam15: library part cam15
D1: library part D1
D2: library part D2
D3: library part D3
D4: library part D4
D5: library part D5
D6: library part D6
D7: library part D7
D8: library part D8
D9: library part D9
D10: library part D10
D11: library part D11
D12: library part D12
D13: library part D13
D14: library part D14
D15: library part D15
D16: library part D16
D17: library part D17
D18: library part D18
D19: library part D19
D20: library part D20
D21: library part D21
D22: library part D22
D23: library part D23
D24: library part D24
F1: library part F1
FI1: library part FI1
FI3: library part FI3
FI4: library part FI4
FI5: library part FI5
FI6: library part FI6
FI7: library part FI7
FI8: library part FI8
FI9: library part FI9
IC1: library part IC1
IC2: library part IC2
IC3: library part IC3
IC4: library part IC4
IC5: library part IC5
IC6: library part IC6
J1: library part J1
J2: library part J2
J3: library part J3
J6: library part J6
J11: library part J11
J22: library part J22
MIR1: library part MIR1
MIR2: library part MIR2
MIR3: library part MIR3
MIR4: library part MIR4
PT1: library part PT1
R1: library part R1
R2: library part R2
R3: library part R3
R4: library part R4
R5: library part R5
R6: library part R6
R7: library part R7
R8: library part R8
R9: library part R9
R10: library part R10
R11: library part R11
R12: library part R12
R13: library part R13
R20: library part R20
R30: library part R30
R31: library part R31
R32: library part R32
R33: library part R33
R35: library part R35
R37: library part R37
R38: library part R38
R39: library part R39
R40: library part R40
R41: library part R41
R42: library part R42
R50: library part R50
R58: library part R58
R59: library part R59
R60: library part R60
T1: library part T1
T2: library part T2
T3: library part T3
T4: library part T4
T5: library part T5
T6: library part T6
T7: library part T7
T8: library part T8
T9: library part T9
T10: library part T10
ZC2: library part ZC21
ZC27: library part ZC22
ZM1: library part ZM1
ZM2: library part ZM2
ZM3: library part ZM3
ZM4: library part ZM4
ZT2: library part ZT2
ZT3: library part ZT3
ZT4: library part ZT4
ZT5: library part ZT5
ZT6: library part ZT6
ZT7: library part ZT7

## Free pads (board coordinates)
  rrect100% 0.05x0.65 on Mech11: 0mm3(104.494,120.704) 0mm3(268.451,183.442) 0mm3(275.118,146.104) 0mm3(276.071,183.696) 0mm3(276.579,164.392) 0mm3(276.706,179.061) 0mm3(278.865,149.597) 0mm3(284.77,145.469) 0mm3(285.329,139.233) 0mm3(286.231,132.007) 0mm3(286.612,145.85) 0mm3(287.501,179.061) 0mm3(288.644,164.392) 0mm3(290.93,149.597) 0mm3(296.899,145.469) 0mm3(297.343,139.233) 0mm3(297.978,189.284) 0mm3(297.978,190.872) 0mm3(297.978,192.459) 0mm3(297.978,194.047) 0mm3(297.978,195.634) 0mm3(297.978,197.222) 0mm3(297.981,135.119) 0mm3(298.804,145.723) 0mm3(299.566,197.222) 0mm3(300.455,164.392) 0mm3(301.153,197.222) 0mm3(301.598,181.029) 0mm3(302.741,197.222) 0mm3(302.995,149.597) 0mm3(304.328,197.222) 0mm3(305.041,181.537) 0mm3(305.916,197.222) 0mm3(307.186,188.884) 0mm3(308.837,145.469) 0mm3(309.408,139.233) 0mm3(310.069,135.944) 0mm3(311.504,155.693) 0mm3(312.901,191.507) 0mm3(314.869,191.57) 0mm3(316.076,158.042) 0mm3(316.584,160.9) 0mm3(316.711,187.379) 0mm3(317.028,139.233) 0mm3(317.028,148.733) 0mm3(317.028,151.121) 0mm3(317.028,153.724) 0mm3(317.727,141.405) 0mm3(317.727,143.183) 0mm3(318.451,186.998) 0mm3(318.552,167.377) 0mm3(318.87,144.58) 0mm3(318.87,155.312) 0mm3(319.187,166.424) 0mm3(319.251,191.634) 0mm3(320.051,186.998) 0mm3(320.14,165.408) 0mm3(320.534,150.105) 0mm3(321.283,188.884) 0mm3(321.283,190.364) 0mm3(324.585,150.232) 0mm3(324.585,151.502) 0mm3(324.585,152.772) 0mm3(324.585,156.582) 0mm3(325.283,191.507) 0mm3(325.664,153.597) 0mm3(325.728,148.962) 0mm3(326.807,154.867) 0mm3(326.969,138.357) 0mm3(327.188,187.57) 0mm3(327.188,191.507) 0mm3(328.077,148.962) 0mm3(328.874,156.582) 0mm3(328.874,161.598) 0mm3(329.093,191.507) 0mm3(330.046,150.232) 0mm3(330.236,144.009) 0mm3(330.744,147.692) 0mm3(330.776,146.326) 0mm3(330.871,151.502) 0mm3(334.491,149.152) 0mm3(334.491,155.312) 0mm3(339.126,148.238) 0mm3(339.126,154.359) 0mm3(339.126,158.487) 0mm3(339.317,160.709) 0mm3(341.539,162.932) 0mm3(341.806,198.959)
  rect 0.5x0 on Mech11: 0mm8(104.494,115.624) 0mm8(277.806,181.459) 0mm8(277.806,194.459) 0mm8(308.286,181.459) 0mm8(308.286,194.459)
  rect 0.693x0.8 on Mech11: 0mm9(104.494,110.544) 0mm9(314.646,194.364) 0mm9(314.646,196.904) 0mm9(317.186,194.364) 0mm9(317.186,196.904) 0mm9(319.726,194.364) 0mm9(319.726,196.904) 0mm9(322.266,194.364) 0mm9(322.266,196.904) 0mm9(324.806,194.364) 0mm9(324.806,196.904)
  rect 0.5x0.3 on Mech11: 0mm95(104.494,105.464) 0mm95(315.758,168.329) 0mm95(315.758,173.409) 0mm95(315.758,179.124) 0mm95(315.758,184.204)
  rrect100% 0.1x1.37 on Mech11: 1mm2(104.494,100.384) 1mm2(256.426,172.497) 1mm2(256.426,177.497) 1mm2(258.926,174.997) 1mm2(261.426,172.497) 1mm2(261.426,177.497) 1mm2(263.926,174.997) 1mm2(271.308,144.517) 1mm2(271.308,147.057) 1mm2(271.308,149.597) 1mm2(271.308,152.137) 1mm2(271.308,154.677) 1mm2(271.308,157.217) 1mm2(271.308,159.757) 1mm2(271.308,162.297) 1mm2(271.308,164.837) 1mm2(271.308,167.377) 1mm2(277.976,151.184) 1mm2(277.976,160.074) 1mm2(280.516,151.184) 1mm2(280.516,160.074) 1mm2(283.056,151.184) 1mm2(283.056,160.074) 1mm2(290.041,151.184) 1mm2(290.041,160.074) 1mm2(292.581,151.184) 1mm2(292.581,160.074) 1mm2(295.121,151.184) 1mm2(295.121,160.074) 1mm2(302.106,151.184) 1mm2(302.106,160.074) 1mm2(304.646,151.184) 1mm2(304.646,160.074) 1mm2(307.186,151.184) 1mm2(307.186,160.074) 1mm2(323.806,166.424) 1mm2(323.806,168.964) 1mm2(323.806,171.504) 1mm2(323.806,174.044) 1mm2(323.806,176.584) 1mm2(323.806,179.124) 1mm2(323.806,181.664) 1mm2(323.806,184.204) 1mm2(323.806,186.744)
  rect 0.9x1 on Mech11: 1mm4(104.494,95.304) 1mm4(253.846,184.204) 1mm4(259.346,184.204)
  rect 1.2x1.2 on Mech11: 3mm5(104.494,90.224) 3mm5(260.306,137.959) 3mm5(260.306,192.159) 3mm5(334.906,137.959) 3mm5(334.906,192.159)
  round 1.524 hole 0.305: VIA-091X03-VE(276.071,183.696) VIA-091X03-VE(276.579,164.392) VIA-091X03-VE(288.644,164.392) VIA-091X03-VE(300.455,164.392) VIA-091X03-VE(301.598,181.029) VIA-091X03-VE(305.041,181.537)

## Via types
v1: diameter 1.27, hole 0.305, Top Layer to Bottom Layer, 81 vias

## Nets (pads, with @x,y where several pads share a name; then routed paths per layer and width w, separated by ;. In a path a pad name is that pad's centre, name@x,y a point inside that pad or via, vN(x,y) a via of type N, cw(c..) or ccw(c..) an arc to the next point about the centre after c; other vN are vias at no path point)
+15V: C5.2 C6.2 C9.2 C12.2 C15.2 C19.1 C27.+ D2.A D3.A D4.A IC1.17 IC1.18 IC2.4 IC2.8 IC3.1 IC4.1 IC5.1 IC6.3 pad.VIA-091X03-VE@301.598,181.029 R50.2 R58.2 R59.2 R60.2 ZC27.+ | length 166.5
  Top Layer w0.508: D2.A@281.934,140.707 R58.2@283.856,140.707 283.92,140.77 285.329,140.77 ; IC3.1@283.216,142.802 284.736,142.802 C9.2@285.181,143.247 285.329,143.247 285.329,140.77 ; v1(285.329,139.233) 285.329,140.77 ; D3.A@293.999,140.707 R59.2@295.921,140.707 297.246,140.707 ; IC4.1@295.281,142.802 296.801,142.802 C12.2@297.246,143.247 ; D4.A@306.064,140.707 R60.2@307.986,140.707 309.408,140.707 ; IC5.1@307.346,142.802 308.866,142.802 C15.2@309.311,143.247 309.408,143.247 309.408,140.707 ; v1(309.408,139.233) 309.408,140.707 ; v1(318.87,144.58) 324.585,144.58 326.744,142.421 IC2.4@328.618,142.421 ; R50.2@318.933,137.532 317.092,137.532 317.028,137.595 v1(317.028,139.233) 317.028,136.833 317.473,136.389 323.061,136.389 323.188,136.262 ; 320.301,153.407 320.301,155.312 v1(318.87,155.312) IC1.17@322.87,155.312 ; C19.1@320.619,153.724 320.936,154.042 IC1.18@322.87,154.042 ; IC2.8@323.219,138.357 323.188,138.327 323.188,136.262 ; C6.2@324.868,136.262 323.188,136.262 ; 297.246,140.707 297.343,140.707 v1(297.343,139.233) 297.343,143.247 C12.2@297.246,143.247 ; 297.246,140.707 C12.2@297.246,143.247
  Top Layer w1: pad.VIA-091X03-VE@301.598,181.029 301.598,171.496 302.68,170.414 306.286,170.414 306.961,171.089 309.091,171.089 ; C5.2@307.186,171.089 311.461,171.089 311.559,171.187 311.559,169.417 312.647,168.329 C27.+@315.758,168.329
  Mid-Layer 2 w1: v1(285.329,139.233) 285.342,139.221 297.343,139.221 309.408,139.221 317.016,139.221 v1(317.028,139.233) 317.028,139.183 318.87,141.024 v1(318.87,144.58) v1(318.87,155.312) 318.87,162.36 315.758,165.472 C27.+@315.758,168.329
  Bottom Layer w1.5: IC6.3@300.441,185.982 300.441,182.186 pad.VIA-091X03-VE@301.598,181.029
+24V: C2.+ C3.2 C24.1 C25.1 C26.1 C28.+ C29.+ D1.K D17.K D18.K D20.K D22.K IC6.1 pad.VIA-091X03-VE@305.041,181.537 T2.D T4.D T6.D ZC2.+ ZT2.D ZT4.D ZT6.D | length 201.7
  Top Layer w1.5: ZT2.D@280.516,151.184 D18.K@280.516,155.629 C24.1@282.958,155.629 ; ZT4.D@292.581,151.184 D20.K@292.581,155.629 C25.1@295.023,155.629 ; D1.K@303.693,172.774 303.693,177.029 ; ZT6.D@304.646,151.184 D22.K@304.646,155.629 C26.1@307.088,155.629 ; 304.963,178.269 304.934,178.269 303.693,177.029 ; pad.VIA-091X03-VE@305.041,181.537 305.041,178.376 304.617,177.952 ; 311.923,181.982 311.923,179.133 311.914,179.124 ; C2.+@315.758,179.124 311.914,179.124 ; 303.693,177.029 304.617,177.952 ; 304.617,177.952 C3.2@309.091,177.952 310.742,177.952 311.914,179.124
  Mid-Layer 2 w1.5: C28.+@277.806,181.459 297.485,181.459 299.82,179.124 311.313,179.124 ; ZT2.D@280.516,151.184 280.516,151.819 282.802,154.105 292.581,154.105 ; ZT4.D@292.581,151.184 292.581,154.105 ; ZT6.D@304.646,151.184 304.646,154.042 304.582,154.105 ; C2.+@315.758,179.124 311.313,179.124 ; 292.581,154.105 304.582,154.105 ; 304.582,154.105 309.662,159.185 309.662,179.124 311.313,179.124
  Bottom Layer w1.5: C28.+@277.806,181.459 277.806,187.824 ; C29.+@277.806,194.459 277.806,187.824 ; T2.D@280.516,140.516 ZT2.D@280.516,151.184 ; D17.K@284.326,187.824 277.806,187.824 ; ZT4.D@292.581,151.184 292.581,140.834 T4.D@292.898,140.516 ; T6.D@304.328,140.516 304.646,140.834 ZT6.D@304.646,151.184 ; pad.VIA-091X03-VE@305.041,181.537 IC6.1@305.041,185.982
BOT-DR-A: D7.K IC1.21 R30.1 | length 37
  Top Layer w0.21: D7.K@305.768,167.377 305.768,167.928 306.043,168.202 308.583,168.202 311.377,165.408 v1(320.14,165.408) ; IC1.21@322.87,150.232 v1(324.585,150.232)
  Top Layer w0.635: R30.1@303.693,167.377 D7.K@305.768,167.377
  Mid-Layer 2 w0.21: v1(320.14,165.408) 320.14,154.677 v1(324.585,150.232)
BOT-DR-B: D6.K IC1.20 R33.1 | length 49.5
  Top Layer w0.21: D6.K@293.703,167.377 293.703,168.182 294.168,168.647 308.773,168.647 311.567,165.853 318.616,165.853 v1(319.187,166.424) ; IC1.20@322.87,151.502 v1(324.585,151.502)
  Top Layer w0.635: R33.1@291.628,167.377 D6.K@293.703,167.377
  Mid-Layer 2 w0.21: v1(319.187,166.424) 320.394,166.424 320.965,165.853 320.965,155.121 v1(324.585,151.502)
BOT-DR-C: D5.K IC1.19 R31.1 | length 61.4
  Top Layer w0.21: D5.K@281.956,167.377 281.956,168.499 282.548,169.091 308.964,169.091 311.758,166.297 317.346,166.297 318.425,167.377 v1(318.552,167.377) ; IC1.19@322.87,152.772 v1(324.585,152.772)
  Top Layer w0.635: R31.1@279.881,167.377 D5.K@281.956,167.377
  Mid-Layer 2 w0.21: v1(318.552,167.377) 320.14,167.377 321.41,166.107 321.41,155.947 v1(324.585,152.772)
BRAKE/: C23.6 FI7.1 J2.4 J22.4 | length 26.6
  Top Layer w0.21: C23.6@320.051,188.884 v1@320.959,188.884 ; v1(321.283,188.884) 321.6,188.566 321.6,185.093 321.981,184.712 321.981,180.949 J22.4@323.806,179.124 ; FI7.1@327.188,190.237 v1(327.188,191.507)
  Mid-Layer 2 w0.21: J2.4@322.266,194.364 320.394,192.492 320.394,189.773 v1(321.283,188.884) 322.445,190.046 325.728,190.046 v1(327.188,191.507)
ENABLE: C23.8 FI9.1 J2.2 J22.2 | length 15.9
  Top Layer w0.21: C23.8@320.051,190.484 320.051,190.846 320.394,191.189 323.378,191.189 ; J22.2@323.806,184.204 322.503,185.507 322.503,189.996 322.743,190.237 FI9.1@323.378,190.237 323.378,191.189 ; J2.2@324.806,194.364 324.806,193.188 323.378,191.761 323.378,191.189
FAULT/: C23.7 FI8.1 J2.3 J22.3 | length 22.7
  Top Layer w0.21: C23.7@320.051,189.684 320.603,189.684 v1(321.283,190.364) 322.073,189.573 322.073,185.255 322.426,184.903 322.426,183.044 J22.3@323.806,181.664 ; FI8.1@325.283,190.237 v1(325.283,191.507)
  Mid-Layer 2 w0.21: v1(321.283,190.364) 323.315,192.396 323.442,192.396 ; J2.3@322.266,196.904 323.442,195.728 323.442,192.396 ; v1(325.283,191.507) 324.394,192.396 323.442,192.396
GND: C2.- C3.1 C5.1 C6.1 C7.1 C8.1 C9.1 C12.1 C15.1 C18.2 C19.2 C20.1 C22.5 C22.6 C22.7 C22.8 C23.1 C23.2 C23.3 C23.4 C27.- IC1.16 IC1.22 IC2.1 IC3.3 IC4.3 IC5.3 IC6.2 J2.1 J6.5 J22.1 PT1.1 R2.1 R5.1 R7.1 T1.S T8.S ZC2.- ZC27.- ZM1.1 ZM2.1 ZM3.1 ZM4.1 | length 276.2
  Top Layer w0.508: IC3.3@283.216,145.469 v1(284.77,145.469) 285.659,144.58 287.154,144.58 287.281,144.453 C9.1@287.281,143.247 ; IC4.3@295.281,145.469 v1(296.899,145.469) 297.915,144.453 298.931,144.453 299.346,144.038 C12.1@299.346,143.247 ; v1(307.186,188.884) C22.7@308.608,188.884 ; v1@307.231,188.884 v1@307.186,188.84 ; IC5.3@307.346,145.469 v1(308.837,145.469) 310.107,145.469 311.411,144.165 C15.1@311.411,143.247 ; C22.6@308.608,189.684 307.186,189.684 ; C22.5@308.608,190.484 308.615,190.491 307.694,190.491 307.186,189.983 307.186,189.684 ; 308.615,188.078 307.757,188.078 307.186,188.649 v1@307.186,188.84 ; v1(317.028,148.733) T1.S@318.603,148.733 ; v1(317.028,153.724) C19.2@318.518,153.724 ; v1(317.727,141.405) 317.79,141.342 C7.1@318.933,141.342 ; v1(317.727,143.183) 317.79,143.247 C8.1@318.933,143.247 ; 318.006,151.502 R2.1@318.933,151.502 ; C23.4@318.451,188.084 C23.3@318.451,188.884 ; C23.2@318.451,189.684 C23.1@318.451,190.484 ; IC1.22@322.87,148.962 v1(325.728,148.962) ; IC1.16@322.87,156.582 v1(324.585,156.582) ; C6.1@326.969,136.262 v1(326.969,138.357) IC2.1@328.618,138.357 ; R5.1@337.348,154.359 v1(339.126,154.359) ; C20.1@337.348,158.487 v1(339.126,158.487) ; T8.S@337.679,148.238 v1(339.126,148.238) ; C18.2@337.764,160.709 v1(339.317,160.709) ; R7.1@340.206,162.932 v1(341.539,162.932) ; v1@307.186,188.84 307.186,189.684
  Top Layer w0.635: v1(318.451,186.998) C23.4@318.451,188.084 ; C23.1@318.451,190.484 318.451,190.833 v1(319.251,191.634) ; PT1.1@339.936,198.809 341.806,198.809 v1(341.806,198.959)
  Top Layer w0.7: 257.594,135.247 ZM1.1@260.306,137.959 ; 257.594,140.671 ZM1.1@260.306,137.959 ; 257.594,189.447 ZM4.1@260.306,192.159 ; 257.594,194.871 ZM4.1@260.306,192.159 ; 263.018,135.247 ZM1.1@260.306,137.959 ; 263.018,140.671 ZM1.1@260.306,137.959 ; 263.018,189.447 ZM4.1@260.306,192.159 ; 263.018,194.871 ZM4.1@260.306,192.159 ; 270.168,158.616 J6.5@271.308,159.757 ; 270.168,160.897 J6.5@271.308,159.757 ; 272.449,158.616 J6.5@271.308,159.757 ; 272.449,160.897 J6.5@271.308,159.757 ; 312.549,142.108 C15.1@311.411,143.247 312.549,144.385 ; 314.726,183.172 C2.-@315.758,184.204 ; 314.726,185.236 C2.-@315.758,184.204 ; 316.791,185.236 C2.-@315.758,184.204 ; 317.38,152.586 C19.2@318.518,153.724 317.38,154.862 ; 317.625,191.31 C23.1@318.451,190.484 ; 317.631,147.761 T1.S@318.603,148.733 317.631,149.705 ; 317.962,150.53 R2.1@318.933,151.502 ; 320.254,183.277 ZC2.-@318.641,181.664 317.028,183.277 316.686,183.277 C2.-@315.758,184.204 ; 323.552,195.65 J2.1@324.806,196.904 ; 323.552,198.158 J2.1@324.806,196.904 ; 326.06,195.65 J2.1@324.806,196.904 ; 326.06,198.158 J2.1@324.806,196.904 ; 332.194,135.247 ZM2.1@334.906,137.959 ; 332.194,140.671 ZM2.1@334.906,137.959 ; 332.194,189.447 ZM3.1@334.906,192.159 ; 332.194,194.871 ZM3.1@334.906,192.159 ; C20.1@337.348,158.487 338.32,157.515 ; 337.618,135.247 ZM2.1@334.906,137.959 ; 337.618,140.671 ZM2.1@334.906,137.959 ; 337.618,189.447 ZM3.1@334.906,192.159 ; 337.618,194.871 ZM3.1@334.906,192.159 ; C18.2@337.764,160.709 338.902,159.571 ; 338.651,147.266 T8.S@337.679,148.238 338.651,149.21 ; PT1.1@339.936,198.809 341.165,197.58 ; 341.178,161.96 R7.1@340.206,162.932 341.178,163.903
  Top Layer w1.016: C5.1@307.186,173.189 309.345,173.189 309.565,173.409 310.805,173.409 ; C3.1@309.091,175.851 310.395,175.851 310.805,175.441 310.805,173.409 ; 318.298,181.664 ZC2.-@318.641,181.664 ; ZC27.-@319.958,170.869 319.958,172.959 319.508,173.409 C27.-@315.758,173.409 310.805,173.409
  Mid-Layer 1 w0.7: 257.594,135.247 ZM1.1@260.306,137.959 ; 257.594,140.671 ZM1.1@260.306,137.959 ; 257.594,189.447 ZM4.1@260.306,192.159 ; 257.594,194.871 ZM4.1@260.306,192.159 ; 263.018,135.247 ZM1.1@260.306,137.959 ; 263.018,140.671 ZM1.1@260.306,137.959 ; 263.018,189.447 ZM4.1@260.306,192.159 ; 263.018,194.871 ZM4.1@260.306,192.159 ; 270.168,158.616 J6.5@271.308,159.757 ; 270.168,160.897 J6.5@271.308,159.757 ; 272.449,158.616 J6.5@271.308,159.757 ; 272.449,160.897 J6.5@271.308,159.757 ; 314.726,172.377 C27.-@315.758,173.409 ; 314.726,174.441 C27.-@315.758,173.409 ; 314.726,183.172 C2.-@315.758,184.204 ; 314.726,185.236 C2.-@315.758,184.204 ; 316.791,172.377 C27.-@315.758,173.409 ; 316.791,174.441 C27.-@315.758,173.409 ; 316.791,183.172 C2.-@315.758,184.204 ; 316.791,185.236 C2.-@315.758,184.204 ; 322.666,185.604 J22.1@323.806,186.744 ; 322.666,187.884 J22.1@323.806,186.744 ; 323.783,195.881 J2.1@324.806,196.904 ; 323.783,197.927 J2.1@324.806,196.904 ; 324.946,185.604 J22.1@323.806,186.744 ; 324.946,187.884 J22.1@323.806,186.744 ; 325.829,195.881 J2.1@324.806,196.904 ; 325.829,197.927 J2.1@324.806,196.904 ; 332.194,135.247 ZM2.1@334.906,137.959 ; 332.194,140.671 ZM2.1@334.906,137.959 ; 332.194,189.447 ZM3.1@334.906,192.159 ; 332.194,194.871 ZM3.1@334.906,192.159 ; 337.618,135.247 ZM2.1@334.906,137.959 ; 337.618,140.671 ZM2.1@334.906,137.959 ; 337.618,189.447 ZM3.1@334.906,192.159 ; 337.618,194.871 ZM3.1@334.906,192.159
  Bottom Layer w0.635: IC6.2@302.741,192.65 v1(302.741,197.222)
  other v1: 317.028,151.121 316.076,158.042 297.978,189.284 297.978,190.872 297.978,192.459 297.978,194.047 297.978,195.634 297.978,197.222 299.566,197.222 301.153,197.222 304.328,197.222 305.916,197.222
GND-PUIS: C24.2 C25.2 C26.2 C28.- C29.- D1.A D8.A D9.A D10.A D24.1 FI1.CG1 FI1.CG2 FI1.CG3 R1.2 R39.2 R40.1 T10.S | length 103.5
  Top Layer w0.508: T10.S@292.911,171.415 D24.1@294.791,171.415 294.791,170.755 295.375,170.171 298.359,170.171 299.248,171.06 D1.A@299.248,172.774 ; R40.1@318.616,162.932 318.933,163.249 R39.2@321.156,163.249
  Top Layer w0.635: C24.2@285.059,155.629 285.059,150.705 286.548,149.216 D9.A@286.548,148.009 ; C25.2@297.124,155.629 297.124,150.769 297.134,150.759 297.134,150.496 298.613,149.016 D10.A@298.613,147.692
  Top Layer w1.5: v1(275.118,146.104) D8.A@275.118,148.009 ; D9.A@286.548,148.009 286.548,145.914 v1(286.612,145.85) ; D10.A@298.613,147.692 298.804,147.501 v1(298.804,145.723) ; D1.A@299.248,172.774 299.248,181.601 300.963,183.315 306.43,183.315 C28.-@308.286,181.459 ; C26.2@309.189,155.629 309.189,155.693 v1(311.504,155.693) ; v1(316.584,160.9) 318.616,160.9 R1.2@318.616,158.804 R40.1@318.616,162.932
  Mid-Layer 2 w0.5: 257.775,176.147 FI1.CG2@258.926,174.997 260.077,176.147 ; 262.775,176.147 FI1.CG3@263.926,174.997
  Mid-Layer 2 w0.7: 255.169,171.24 FI1.CG1@256.426,172.497 ; 255.169,173.753 FI1.CG1@256.426,172.497 ; 257.683,171.24 FI1.CG1@256.426,172.497 ; FI1.CG2@258.926,174.997 260.183,173.74 ; 262.669,173.74 FI1.CG3@263.926,174.997 265.183,173.74 ; 307.298,182.447 C28.-@308.286,181.459 309.274,182.447 ; 307.298,193.471 C29.-@308.286,194.459 ; 307.298,195.447 C29.-@308.286,194.459 ; 309.274,193.471 C29.-@308.286,194.459 ; 309.274,195.447 C29.-@308.286,194.459
  Mid-Layer 2 w1.5: FI1.CG1@256.426,172.497 FI1.CG2@258.926,174.997 FI1.CG3@263.926,174.997 265.488,176.559 ; 306.706,181.459 C28.-@308.286,181.459 310.606,181.459
ISENS: D5.A D6.A D7.A D19.A D21.A D23.A pad.VIA-091X03-VE@276.579,164.392 pad.VIA-091X03-VE@288.644,164.392 pad.VIA-091X03-VE@300.455,164.392 R1.1 R38.2 R40.2 T3.S T5.S T7.S ZT3.S ZT5.S ZT7.S | length 85.3
  Top Layer w0.508: R1.1@312.266,158.804 312.266,156.772 313.409,155.629 R38.2@314.806,155.629
  Top Layer w0.635: D19.A@283.056,163.884 283.056,165.662 284.156,166.762 D5.A@284.156,167.377 ; D21.A@295.121,163.884 295.121,165.916 295.904,166.699 D6.A@295.904,167.377 ; D23.A@307.186,163.884 307.186,165.472 307.969,166.254 D7.A@307.969,167.377
  Top Layer w1.5: ZT3.S@283.056,160.074 D19.A@283.056,163.884 ; ZT5.S@295.121,160.074 D21.A@295.121,163.884 ; ZT7.S@306.868,160.392 308.456,158.804 R1.1@312.266,158.804 R40.2@312.266,162.932 ; ZT7.S@307.186,160.074 D23.A@307.186,163.884
  Mid-Layer 2 w1.5: pad.VIA-091X03-VE@276.579,164.392 283.056,164.392 ; ZT3.S@283.056,160.074 283.056,164.392 ; ZT5.S@295.121,160.074 295.121,164.392 ; ZT7.S@306.868,160.392 306.868,163.186 305.662,164.392 pad.VIA-091X03-VE@300.455,164.392 295.121,164.392 ; 283.056,164.392 pad.VIA-091X03-VE@288.644,164.392 295.121,164.392
  Bottom Layer w1.5: pad.VIA-091X03-VE@276.579,164.392 T3.S@278.216,164.392 ; pad.VIA-091X03-VE@288.644,164.392 T5.S@290.281,164.392 ; pad.VIA-091X03-VE@300.455,164.392 302.028,164.392
N1: C4.+ F1.2 R4.2 T9.S | length 27.3
  Top Layer w0.635: 273.912,177.219 R4.2@275.436,177.219
  Top Layer w1.5: v1@268.451,183.764 268.769,184.082 273.84,184.082 274.602,183.32 274.602,178.798 273.912,178.108 273.912,177.219 273.912,175.822 274.179,175.555 F1.2@274.179,172.139 C4.+@278.789,172.139
  Bottom Layer w1.5: v1(268.451,183.442) 268.691,183.682 T9.S@268.691,186.3
N2: C1.1 FI1.PSG J1.1 J11.1 | length 28.7
  Top Layer w1.5: FI1.PSG@256.426,177.497 259.888,180.959 269.806,180.959 267.435,180.959 267.435,177.253 C1.1@267.401,177.219
  Mid-Layer 2 w1.5: J11.1@253.846,184.204 253.846,180.077 FI1.PSG@256.426,177.497
N3: IC1.23 T1.D | length 3.7
  Top Layer w0.21: T1.D@319.568,146.65 320.686,146.65 321.727,147.692 IC1.23@322.87,147.692
N4: IC1.12 IC1.13 | length 9.9
  Top Layer w0.21: IC1.13@322.87,160.519 IC1.12@332.776,160.519
N5: R3.1 T10.D | length 3.2
  Top Layer w0.635: R3.1@288.771,173.409 291.857,173.409 T10.D@291.946,173.498
N6: C1.2 FI1.B J1.2 J11.2 | length 23.4
  Top Layer w1.5: FI1.B@261.426,177.497 264.364,177.497 266.004,175.857 266.546,175.314 268.324,175.314 269.501,176.491 C1.2@269.501,177.219 270.483,177.219 272.806,179.542 J1.2@272.806,180.959
  Mid-Layer 2 w1.5: J11.2@259.346,184.204 259.346,179.577 FI1.B@261.426,177.497